# Altium PCB PCB3.PcbDoc
Units mm, origin at the board's own origin, x right, y up, seen from the top; angles counter-clockwise.
Board outline 74.55 x 68.9 mm, 4 copper layers (Top Layer, Internal Plane 1, Internal Plane 2, Bottom Layer); 10 components, 6 nets, 145 pads, 0 vias.
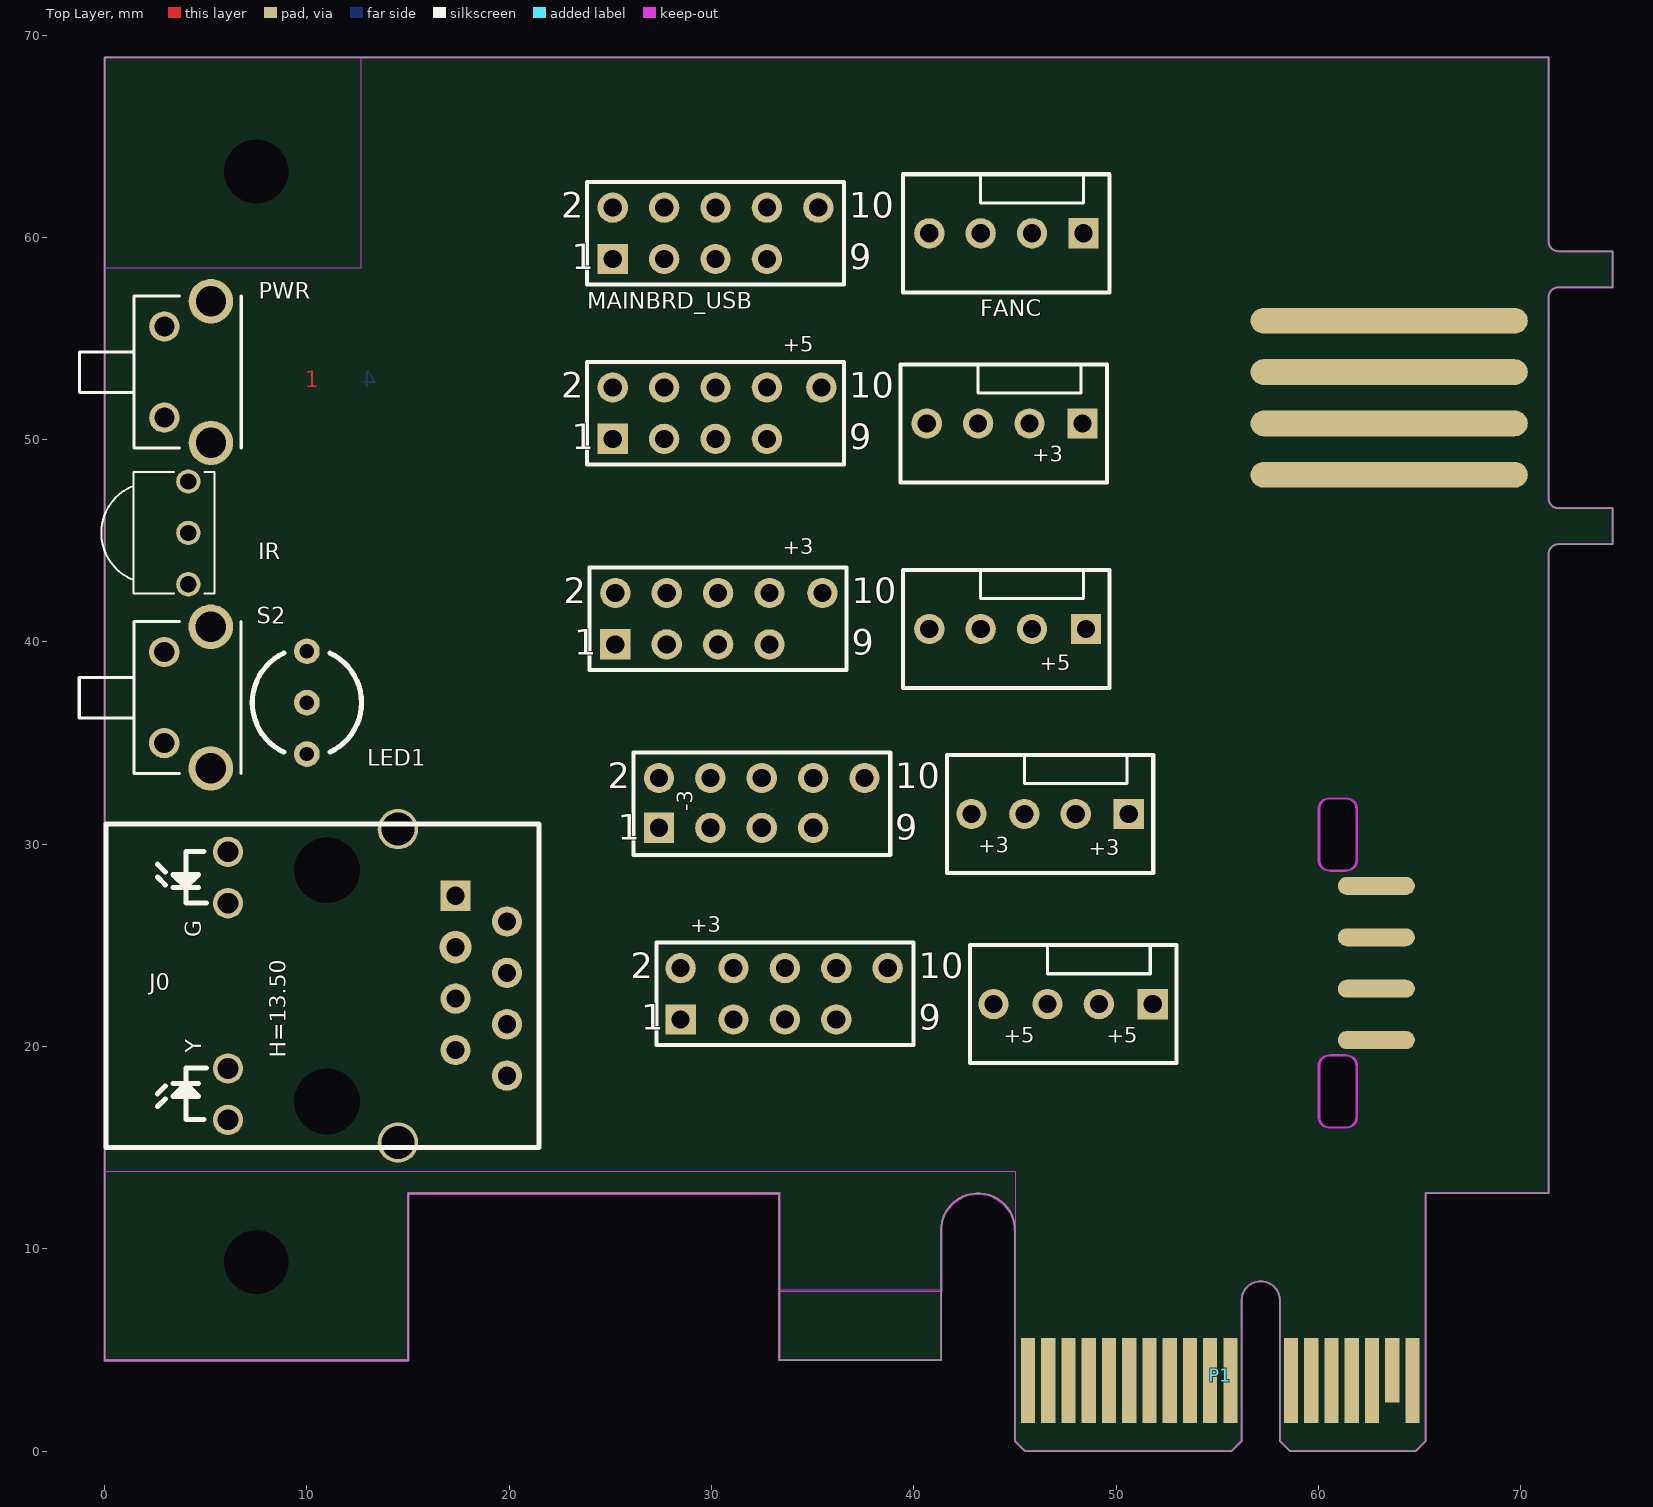
[diagram p0: Top Layer view]
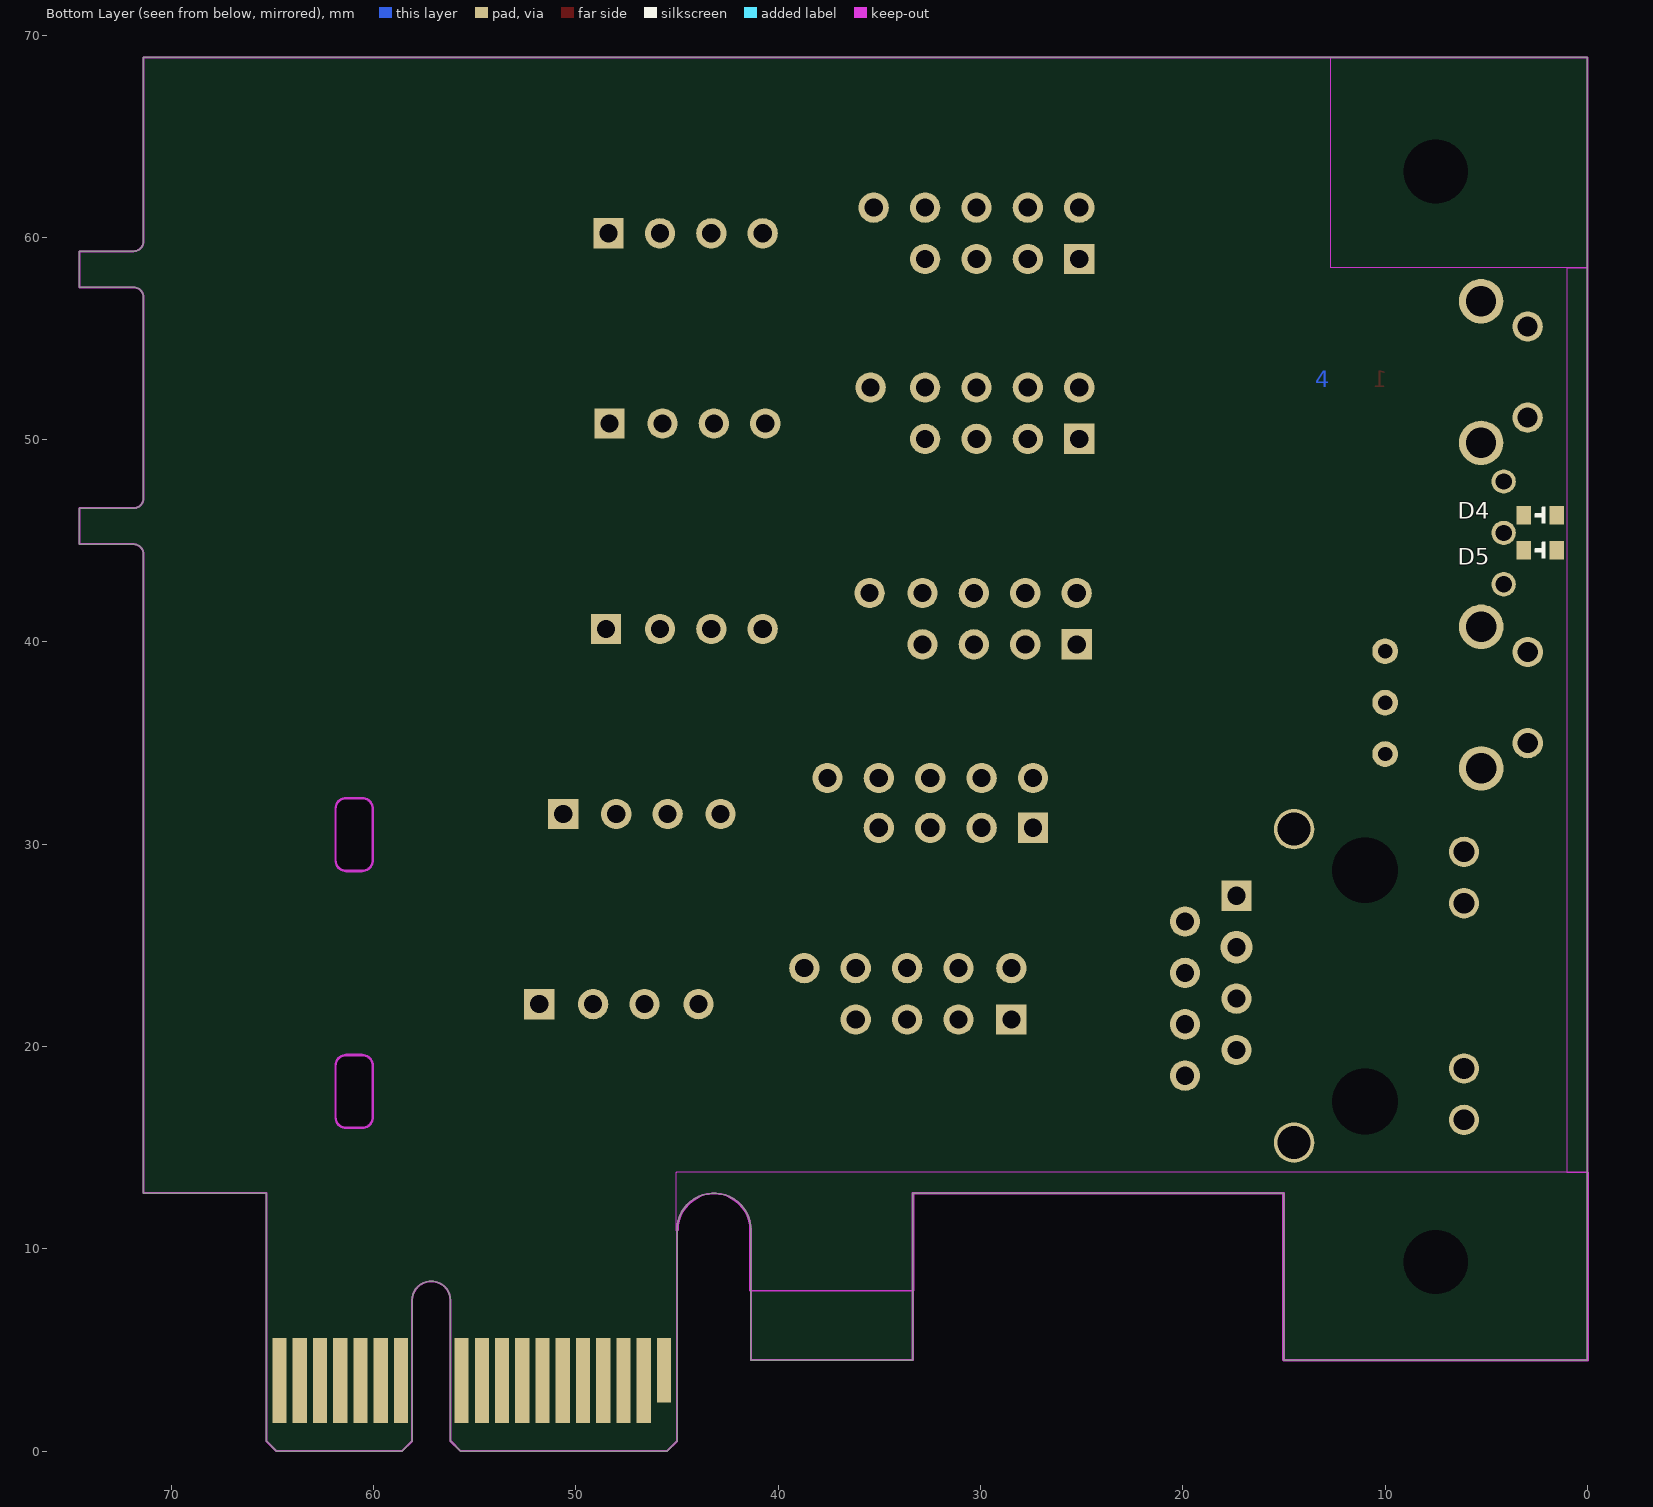
[diagram p1: Bottom Layer view, seen from below]
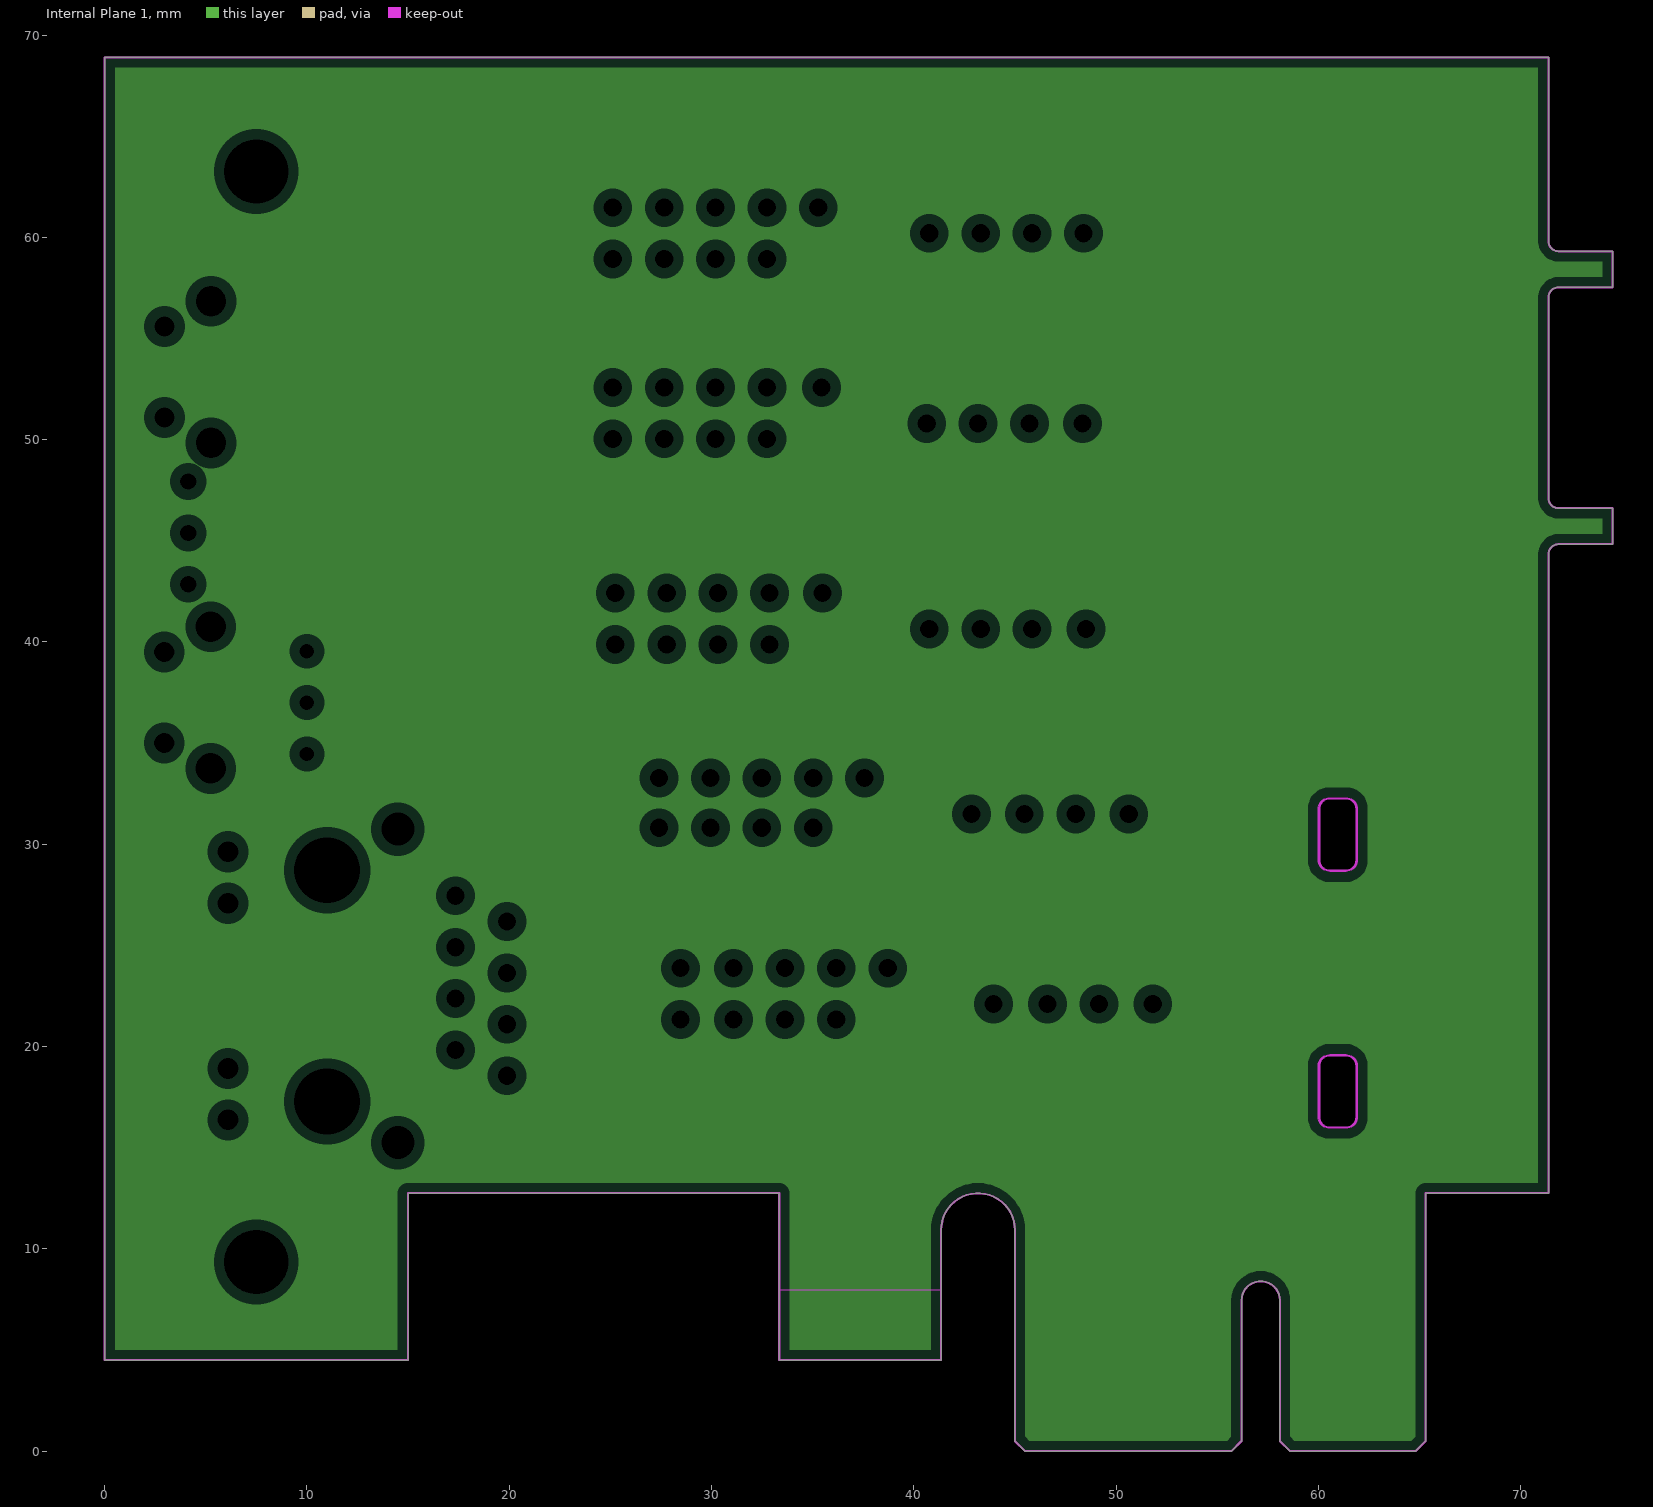
[diagram p2: Internal Plane 1, clearances drawn from the general rule]
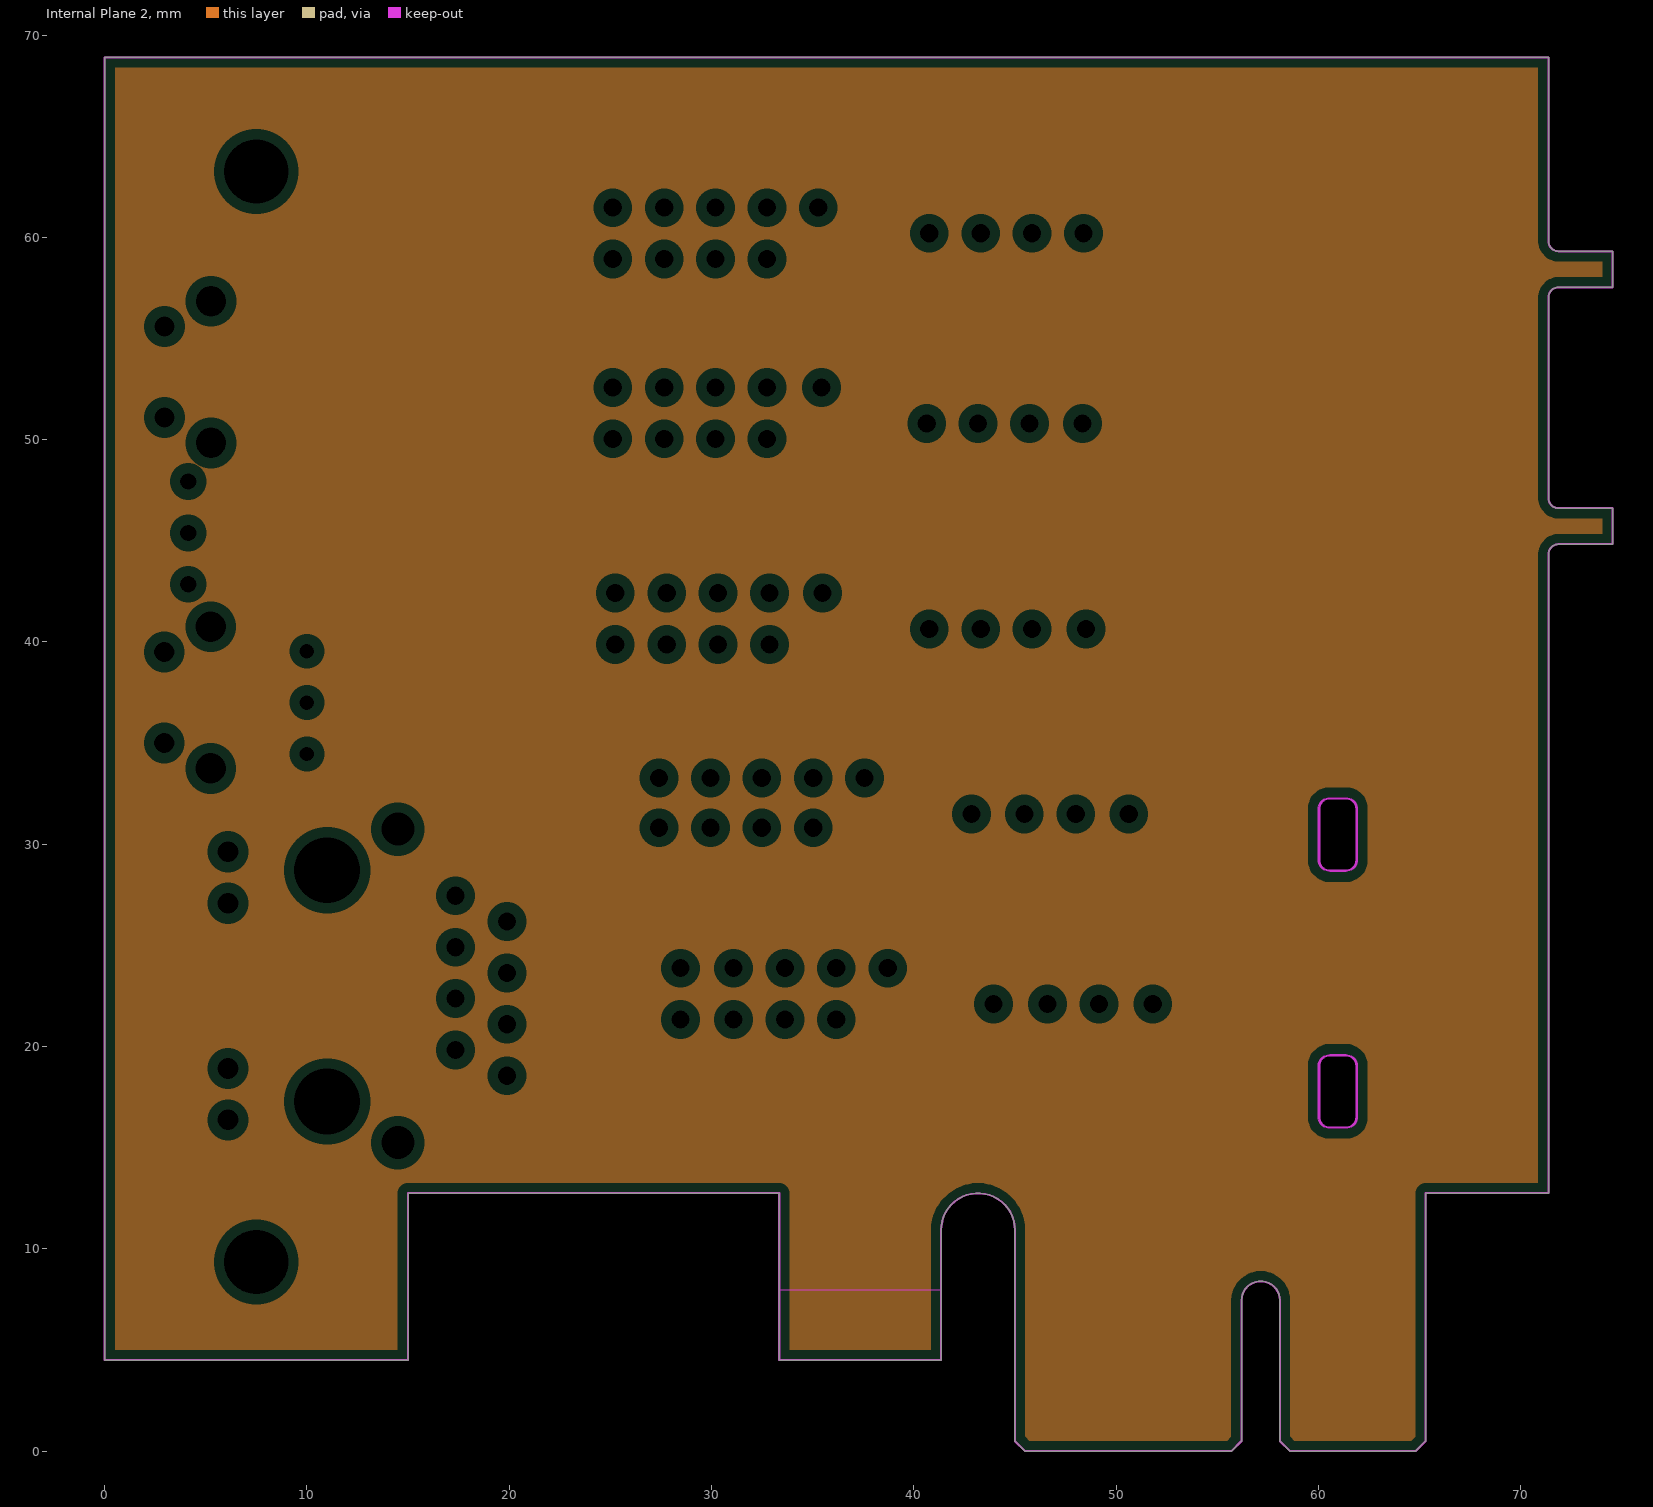
[diagram p3: Internal Plane 2, clearances drawn from the general rule]

## Layer stack, top to bottom
Top Solder: solder mask 0.0102, Solder Resist, Dk 3.5
Top Layer: signal copper 0.0356
Dielectric 1: dielectric 0.32, FR-4, Dk 4.8
Internal Plane 1: plane copper 0.0356
Dielectric2: dielectric 0.32, FR-4, Dk 4.8
Internal Plane 2: plane copper 0.0356
Dielectric3: dielectric 0.32, FR-4, Dk 4.8
Bottom Layer: signal copper 0.0356
Bottom Solder: solder mask 0.0102, Solder Resist, Dk 3.5

## Board outline
0,4.5 15,4.5 15,12.75 33.35,12.75 33.35,4.5 41.35,4.5 41.35,10.925 cw(c43.175,10.925) 45,10.925 45,0.5 45.5,0 55.7,0 56.2,0.5 56.2,7.45 cw(c57.15,7.45) 58.1,7.45 58.1,0.5 58.6,0 64.8,0 65.3,0.5 65.3,12.75 71.374,12.75 71.375,12.751 71.375,44.331 cw(c71.875,44.331) 71.875,44.831 71.882,44.831 74.549,44.831 74.549,46.609 71.882,46.609 71.875,46.609 cw(c71.875,47.109) 71.375,47.109 71.375,57.031 cw(c71.875,57.031) 71.875,57.531 71.882,57.531 74.549,57.531 74.549,59.309 71.882,59.309 71.875,59.309 cw(c71.875,59.809) 71.375,59.809 71.375,68.899 71.374,68.9 0,68.9
cut-out: 60.554,15.952 ccw(c60.554,16.002) 60.554,15.952 cw(c60.554,16.51) 59.995,16.51 59.995,19.05 cw(c60.554,19.05) 60.554,19.608 cw(c60.554,19.558) 60.558,19.608 cw(c60.562,19.558) 60.562,19.608 61.366,19.608 ccw(c61.366,19.558) 61.366,19.608 cw(c61.366,19.05) 61.925,19.05 cw(c61.874,19.05) 61.925,19.05 ccw(c61.874,19.05) 61.925,19.05 61.925,16.535 cw(c61.874,16.535) 61.923,16.523 cw(c61.874,16.51) 61.925,16.51 cw(c61.366,16.51) 61.366,15.952 cw(c61.366,16.002) 61.354,15.953 cw(c61.341,16.002) 61.341,15.952
cut-out: 60.554,28.652 ccw(c60.554,28.702) 60.554,28.652 cw(c60.554,29.21) 59.995,29.21 59.995,31.75 cw(c60.554,31.75) 60.554,32.308 cw(c60.554,32.258) 60.558,32.308 cw(c60.562,32.258) 60.562,32.308 61.366,32.308 ccw(c61.366,32.258) 61.366,32.308 cw(c61.366,31.75) 61.925,31.75 cw(c61.874,31.75) 61.925,31.75 ccw(c61.874,31.75) 61.925,31.75 61.925,29.235 cw(c61.874,29.235) 61.923,29.223 cw(c61.874,29.21) 61.925,29.21 cw(c61.366,29.21) 61.366,28.652 cw(c61.366,28.702) 61.354,28.653 cw(c61.341,28.702) 61.341,28.652

## Design rules (kind name [scope] priority, off if disabled: settings)
Clearance [All] p1: gap=0.254 ignorepadtopadclearanceinfootprint=FALSE except(0: Arc-Hole Track-Hole SMDPad-Hole THPad-Hole Via-Hole Fill-Hole Poly-Hole Region-Hole Text-Hole)
PlaneClearance [All] p1: clearance=0.508
PlaneConnect [All] p1: planeconnectstyle=Relief reliefexpansion=0.508 reliefentries=4 reliefconductorwidth=0.254 reliefairgap=0.254
PolygonConnect [All] p1: connectstyle=Relief reliefconductorwidth=0.254 reliefentries=4 polygonreliefangle="90 Angle" airgapwidth=0.254
RoutingVias [All] p1: holewidth=0.711 width=1.27 viastyle="Through Hole" minholewidth=0.711 minwidth=1.27 maxholewidth=0.711 maxwidth=1.27
SolderMaskExpansion [All] p1: expansion=0.102
Width [All] p1: maxlimit=0.254 minlimit=0.254 preferedwidth=0.254
28 further rules are at their usual default settings.

## Components (designator, comment, footprint, x,y, rotation, side; value= is the part's Value field where it differs from the comment)
D4 "LED_0603, GREEN" LED_0603_GREEN 2.337,46.253 r0 bottom
D5 "LED_0603, RED" LED_0603_RED 2.337,44.526 r0 bottom
FANC "Header 4" FAN_CONN-4P 48.387,60.198 r0 top (schematic designator FAN)
IR "IRM-36xx" IRM-36XX 4.14,45.39 r270 top
J0 "HR911105A" RJ45-8P8C 11,23 r90 top
LED1 "LED-BICOLOR_CA" LED-BICOLOR 10,37 r270 top
MAINBRD_USB "Header 5X2, Without  Pin 9" HDR2X5-9 25.121,58.928 r0 top
P1 "PCIeX1-GF-2D-1000-1K-O36" PCIeX1-GF-2D-1000-1K-O36 55.15,3.5 r0 top locked
PWR "BTN" SW-SIDE 5.258,53.34 r270 top
S2 "BTN" SW-SIDE 5.25,37.25 r270 top

## Footprints (in the part's own frame and the unit in brackets; to place one, negate y for a bottom-side part, rotate by r counter-clockwise, add the part's x,y. Pads: shape width x height; smd on the part's side, far side on the other; paste and mask are expansions set on the pad)
FAN_CONN-4P [mm] "PWM Fan Connector 4 Pin"
  rect 1.5x1.5 hole 0.9: 1(0,0)
  round 1.5 hole 0.9: 2(-2.54,0) 3(-5.08,0) 4(-7.62,0)
  silkscreen extent -8.91,-2.92 1.29,2.92
HDR2X5-9 [mm] "Connector; Header; 5x2 Position, Without Pin 9"
  rect 1.5x1.5 hole 0.9: 1(0,0)
  round 1.5 hole 0.9: 2(0,2.54) 3(2.54,0) 4(2.54,2.54) 5(5.08,0) 6(5.08,2.54) 7(7.62,0) 8(7.62,2.54) 10(10.16,2.54)
  silkscreen extent -1.27,-1.27 11.43,3.81
IRM-36XX [mm]
  round 1.2 hole 0.8: 1(-2.54,0) 2(0,0) 3(2.54,0)
  silkscreen extent -3,-4.3 3,1.3, body extent -3,-4.3 3,1.3, height 6.95
LED-BICOLOR [mil]
  round 50 hole 28: 1(-100,0) 2(0,0) 3(100,0)
  silkscreen extent -96,-106 96,106
LED_0603_GREEN [mil]
  rect 28x36 smd: 1(-32,0) 2(32,0)
  silkscreen extent -10,-16 10,16, body extent -32,-16 32,16, height 24
LED_0603_RED [mil]
  rect 28x36 smd: 1(-32,0) 2(32,0)
  silkscreen extent -10,-16 10,16, body extent -32,-16 32,16, height 24
PCIeX1-GF-2D-1000-1K-O36 [mm] "Golden finger, PCIeX1, Dual, Opposite, Pitch 1mm, 36-Position"
  rect 0.7x3.2 smd far side paste-1: A1(-9.5,0.5)
  rect 0.7x4.2 smd far side paste-1: A2(-8.5,0) A3(-7.5,0) A4(-6.5,0) A5(-5.5,0) A6(-4.5,0) A7(-3.5,0) A8(-2.5,0) A9(-1.5,0) A10(-0.5,0) A11(0.5,0) A12(3.5,0) A13(4.5,0) A14(5.5,0) A15(6.5,0) A16(7.5,0) A17(8.5,0) A18(9.5,0)
  rect 0.7x4.2 smd paste-1: B1(-9.5,0) B2(-8.5,0) B3(-7.5,0) B4(-6.5,0) B5(-5.5,0) B6(-4.5,0) B7(-3.5,0) B8(-2.5,0) B9(-1.5,0) B10(-0.5,0) B11(0.5,0) B12(3.5,0) B13(4.5,0) B14(5.5,0) B15(6.5,0) B16(7.5,0) B18(9.5,0)
  rect 0.7x3.2 smd paste-1: B17(8.5,0.5)
RJ45-8P8C [mm]
  rect 1.5x1.5 hole 0.9: 1(4.45,-6.35)
  round 1.5 hole 0.9: 2(3.18,-8.89) 4(0.64,-8.89) 5(-0.63,-6.35) 6(-1.9,-8.89) 7(-3.17,-6.35) 8(-4.44,-8.89)
  round 1.6 hole 0.9: 3(1.91,-6.35)
  round 1.5 hole 1.02: 9(6.625,4.9) 10(4.085,4.9) 11(-4.085,4.9) 12(-6.625,4.9)
  round 2 hole 1.63: 13(7.745,-3.5) 14(-7.745,-3.5)
  round 2.95 hole 3.25 unplated: MH1(5.715,0) MH2(-5.715,0)
  silkscreen extent -8,-10.48 8,10.92
SW-SIDE [mm]
  round 2.2 hole 1.5: 0(-3.5,0) 0(3.5,0)
  round 1.5 hole 1: 1(-2.25,-2.3) 2(2.25,-2.3)
  silkscreen extent -3.75,-6.5 3.75,1.5, body extent -3.75,-12.8 3.75,1.5, height 7.2

## Part data
D4 D5: library part LED_0603, "LED"
FANC: "Header, 4-Pin", LatestRevisionDate=17-Jul-2002, LatestRevisionNote="Re-released for DXP Platform.", Publisher="Altium Limited"
J0: library part RJ45INTLED
MAINBRD_USB: library part "Header 5X2", "Header, 5-Pin, Dual row", LatestRevisionDate=17-Jul-2002, LatestRevisionNote="Re-released for DXP Platform.", Publisher="Altium Limited"
P1: library part CMP-0001-00030-2, "Golden finger, PCIeX1, Dual, Opposite, Pitch 1mm, 36-Position", ClassName="Edge Connector", Datasheet Version="rev2.0, Apr-2007", Mating Connector=Molex-87715-9006, Package Reference=PCIeX1-GF-2D-1000-1K-O36, Publisher=Altium
PWR S2: library part SW-PB, "Switch", LatestRevisionDate=17-Jul-2002, LatestRevisionNote="Re-released for DXP Platform.", PackageReference=SPST-2, Published=24-Mar-1999, Publisher="Altium Limited"

## Free pads (board coordinates)
  rect 1.5x1.5 hole 0.9: 1(25.121,50.038) 1(25.248,39.878) 1(27.407,30.81) 1(28.473,21.336) 1(48.336,50.8) 1(48.514,40.64) 1(50.622,31.496) 1(51.816,22.098)
  round 1.5 hole 0.9: 2(25.121,52.578) 2(25.248,42.418) 2(27.407,33.274) 2(28.473,23.876) 2(45.72,50.8) 2(45.847,40.64) 2(48.006,31.496) 2(49.149,22.098) 3(27.661,50.038) 3(27.788,39.878) 3(29.947,30.81) 3(31.09,21.336) 3(43.18,50.8) 3(43.307,40.64) 3(45.466,31.496) 3(46.609,22.098) 4(27.661,52.578) 4(27.788,42.418) 4(29.947,33.274) 4(31.09,23.876) 4(40.64,50.8) 4(40.767,40.64) 4(42.85,31.496) 4(43.942,22.098) 5(30.201,50.038) 5(30.328,39.878) 5(32.487,30.81) 5(33.63,21.336) 6(30.201,52.578) 6(30.328,42.418) 6(32.487,33.274) 6(33.63,23.876) 7(32.741,50.038) 7(32.868,39.878) 7(35.027,30.81) 7(36.17,21.336) 8(32.741,52.578) 8(32.868,42.418) 8(35.027,33.274) 8(36.17,23.876) 10(35.433,52.578) 10(35.484,42.418) 10(37.567,33.274) 10(38.71,23.876)
  oval 13.7x1.27 smd: 11(63.5,48.26) 11(63.5,50.8) 11(63.5,53.34) 11(63.5,55.88)
  oval 3.81x0.889 smd: 13(62.865,20.32) 13(62.865,22.86) 13(62.865,25.4) 13(62.865,27.94)
  round 2.88 hole 3.18 unplated: MH1(7.5,9.35) MH2(7.5,63.25)

## Nets (pads, with @x,y where several pads share a name; then routed paths per layer and width w, separated by ;. In a path a pad name is that pad's centre, name@x,y a point inside that pad or via, vN(x,y) a via of type N, cw(c..) or ccw(c..) an arc to the next point about the centre after c; other vN are vias at no path point)
n1: 
n2: 
n3: 
n4: 
n5: S2.1
n6: S2.2
pads on no net: D4.1 D4.2 D5.1 D5.2 FANC.1 FANC.2 FANC.3 FANC.4 IR.1 IR.2 IR.3 J0.1 J0.2 J0.3 J0.4 J0.5 J0.6 J0.7 J0.8 J0.9 J0.10 J0.11 J0.12 J0.13 J0.14 J0.MH1 J0.MH2 LED1.1 LED1.2 LED1.3 MAINBRD_USB.1 MAINBRD_USB.2 MAINBRD_USB.3 MAINBRD_USB.4 MAINBRD_USB.5 MAINBRD_USB.6 MAINBRD_USB.7 MAINBRD_USB.8 MAINBRD_USB.10 P1.A1 P1.A2 P1.A3 P1.A4 P1.A5 P1.A6 P1.A7 P1.A8 P1.A9 P1.A10 P1.A11 P1.A12 P1.A13 P1.A14 P1.A15 P1.A16 P1.A17 P1.A18 P1.B1 P1.B2 P1.B3 P1.B4 P1.B5 P1.B6 P1.B7 P1.B8 P1.B9 P1.B10 P1.B11 P1.B12 P1.B13 P1.B14 P1.B15 P1.B16 P1.B17 P1.B18 PWR.0 PWR.1 PWR.2 S2.0

## Polygon pours and split planes (outlines as drawn)
no net on Internal Plane 1 (split plane): 304 vertices, not listed, extent 0.51,0.51 74.039,68.39
no net on Internal Plane 2 (split plane): 304 vertices, not listed, extent 0.51,0.51 74.039,68.39

## Keep-outs
Top Layer:
  rectangle: 0,58.5 12.7,68.9
  region: 0,4.45 15,4.45 ccw(c15,4.5) 15.05,4.5 15.05,12.7 33.3,12.7 33.3,7.95 ccw(c33.35,7.95) 33.35,7.9 41.35,7.9 ccw(c41.35,7.95) 41.4,7.95 ccw(c41.35,7.95) 41.4,7.951 41.4,10.925 cw(c43.175,10.925) 44.95,10.925 ccw(c45,10.925) 45.05,10.925 45.05,13.75 ccw(c45,13.75) 45,13.8 0,13.8 ccw(c0,13.75) -0.05,13.75 -0.05,4.5 ccw(c0,4.5)
Bottom Layer:
  rectangle: 0,58.5 12.7,68.9
  rectangle: 0,13.75 1,58.5
  region: 0,4.45 15,4.45 ccw(c15,4.5) 15.05,4.5 15.05,12.7 33.3,12.7 33.3,7.95 ccw(c33.35,7.95) 33.35,7.9 41.35,7.9 ccw(c41.35,7.95) 41.4,7.95 ccw(c41.35,7.95) 41.4,7.951 41.4,10.925 cw(c43.175,10.925) 44.95,10.925 ccw(c45,10.925) 45.05,10.925 45.05,13.75 ccw(c45,13.75) 45,13.8 0,13.8 ccw(c0,13.75) -0.05,13.75 -0.05,4.5 ccw(c0,4.5)
Keep-Out Layer:
  rectangle: 33.35,4.5 41.35,7.95
  lines w0.1: 60.554,19.558 ccw(c60.554,19.05) 60.046,19.05 60.046,16.51 ccw(c60.554,16.51) 60.554,16.002 61.341,16.002 ; 60.554,32.258 ccw(c60.554,31.75) 60.046,31.75 60.046,29.21 ccw(c60.554,29.21) 60.554,28.702 61.341,28.702 ; 60.562,19.558 61.366,19.558 cw(c61.366,19.05) 61.874,19.05 61.874,16.535 ; 60.562,32.258 61.366,32.258 cw(c61.366,31.75) 61.874,31.75 61.874,29.235 ; 61.366,16.002 ccw(c61.366,16.51) 61.874,16.51 ; 61.366,28.702 ccw(c61.366,29.21) 61.874,29.21 ; 71.374,12.75 65.3,12.75 65.3,0.5 64.8,0 58.6,0 58.1,0.5 58.1,7.45 ccw(c57.15,7.45) 56.2,7.45 56.2,0.5 55.7,0 45.5,0 45,0.5 45,10.925 ccw(c43.175,10.925) 41.35,10.925 41.35,4.5 33.35,4.5 33.35,12.75 15,12.75 15,4.5 0,4.5 0,31.95 0,68.9 71.374,68.9 ; 71.375,12.751 71.375,44.331 cw(c71.875,44.331) 71.875,44.831 ; 71.375,68.899 71.375,59.809 ccw(c71.875,59.809) 71.875,59.309 ; 71.875,46.609 cw(c71.875,47.109) 71.375,47.109 71.375,57.031 cw(c71.875,57.031) 71.875,57.531 ; 71.882,44.831 74.549,44.831 74.549,46.609 72.796,46.609 71.882,46.609 ; 71.882,57.531 74.549,57.531 74.549,59.309 72.796,59.309 71.882,59.309

## Other copper
Top Layer:
  text "1" at 9.906,52.578 h0.81
Bottom Layer:
  text "4" at 13.462,52.578 h0.81
Internal Plane 1 (plane layer: these items are gaps in the copper):
  text "2" at 10.668,52.578 h0.81
Internal Plane 2 (plane layer: these items are gaps in the copper):
  text "3" at 12.446,52.578 h0.81

## Silkscreen, mask and mechanical layers (free items; w line width, h text height)
Top Overlay:
  lines w0.152: 43.18,53.7 43.18,52.3 48.26,52.3 48.26,53.72 ; 43.307,43.54 43.307,42.14 48.387,42.14 48.387,43.56 ; 45.466,34.396 45.466,32.996 50.546,32.996 50.546,34.416 ; 46.609,24.998 46.609,23.598 51.689,23.598 51.689,25.018
  lines w0.2: 23.851,48.768 23.851,53.848 36.551,53.848 36.551,48.768 23.851,48.768 ; 23.978,38.608 23.978,43.688 36.678,43.688 36.678,38.608 23.978,38.608 ; 26.137,29.464 26.137,34.544 38.837,34.544 38.837,29.464 26.137,29.464 ; 27.28,20.066 27.28,25.146 39.98,25.146 39.98,20.066 27.28,20.066 ; 39.35,47.88 49.55,47.88 49.55,53.72 39.35,53.72 39.35,47.88 ; 39.477,37.72 49.677,37.72 49.677,43.56 39.477,43.56 39.477,37.72 ; 41.636,28.576 51.836,28.576 51.836,34.416 41.636,34.416 41.636,28.576 ; 42.779,19.178 52.979,19.178 52.979,25.018 42.779,25.018 42.779,19.178
  text "+5" at 33.528,54.356 h0.76
  text "2" at 22.581,52.07 h1.27
  text "10" at 36.805,52.07 h1.27
  text "1" at 23.089,49.53 h1.27
  text "9" at 36.805,49.53 h1.27
  text "+3" at 45.847,48.895 h0.76
  text "+3" at 33.528,44.323 h0.76
  text "2" at 22.708,41.91 h1.27
  text "10" at 36.932,41.91 h1.27
  text "1" at 23.216,39.37 h1.27
  text "9" at 36.932,39.37 h1.27
  text "+5" at 46.228,38.608 h0.76
  text "2" at 24.867,32.766 h1.27
  text "10" at 39.091,32.766 h1.27
  text "-3" at 29.083,31.623 h0.76 r90
  text "1" at 25.375,30.226 h1.27
  text "9" at 39.091,30.226 h1.27
  text "+3" at 43.18,29.591 h0.76
  text "+3" at 48.641,29.464 h0.76
  text "+3" at 28.956,25.654 h0.76
  text "2" at 26.01,23.368 h1.27
  text "10" at 40.234,23.368 h1.27
  text "1" at 26.518,20.828 h1.27
  text "9" at 40.234,20.828 h1.27
  text "+5" at 44.45,20.193 h0.76
  text "+5" at 49.53,20.193 h0.76
Top Solder:
  rectangle: 33.35,4.5 41.35,7.95
  rectangle: 9.525,52.451 13.716,53.467
Bottom Solder:
  rectangle: 33.35,4.5 41.35,7.95
  rectangle: 9.525,52.451 13.716,53.467
Mechanical 7:
  lines w0.1: 0,4.5 15,4.5 15,12.75 33.35,12.75 33.35,7.95 41.35,7.95 41.35,10.925 cw(c43.175,10.925) 45,10.925 45,13.75 0,13.75 0,4.5

## Text inside footprints (layer, text, board x,y; h text height)
J0: Top Overlay "H=13.50" at 8.968,19.444 h0.8 r90; Top Overlay "Y" at 4.777,19.698 h0.8 r90; Top Overlay "G" at 4.777,25.413 h0.8 r90
MAINBRD_USB: Top Overlay "2" at 22.581,60.96 h1.27; Top Overlay "1" at 23.089,58.42 h1.27; Top Overlay "9" at 36.805,58.42 h1.27; Top Overlay "10" at 36.805,60.96 h1.27